# Altium PCB PCB1.PcbDoc
Units mm, origin at the board's own origin, x right, y up, seen from the top; angles counter-clockwise.
Board outline 21.6 x 22.6 mm, 2 copper layers (Top Layer, Bottom Layer), stack 1.571 mm thick; 14 components, 11 nets, 32 pads, 0 vias.
Unrouted connection lines stored in the file: 25.
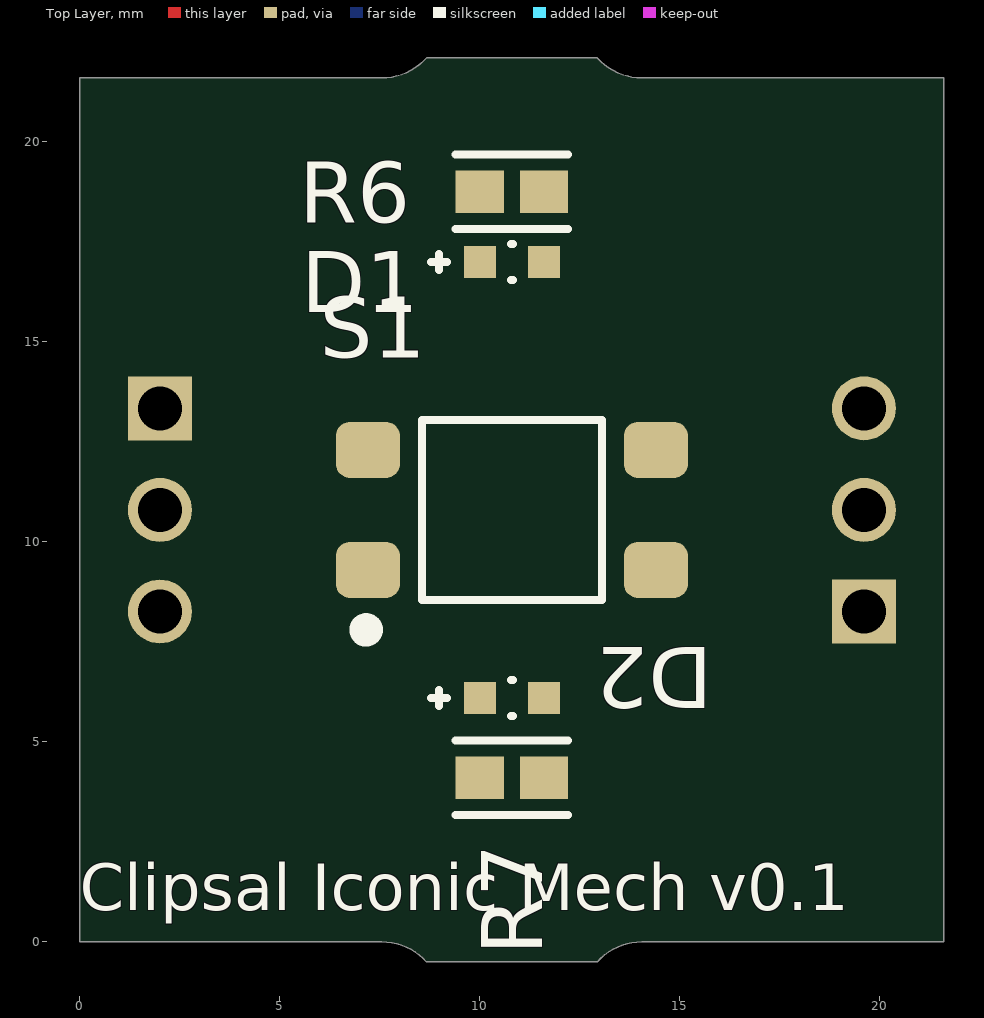
[diagram p0: Top Layer view]
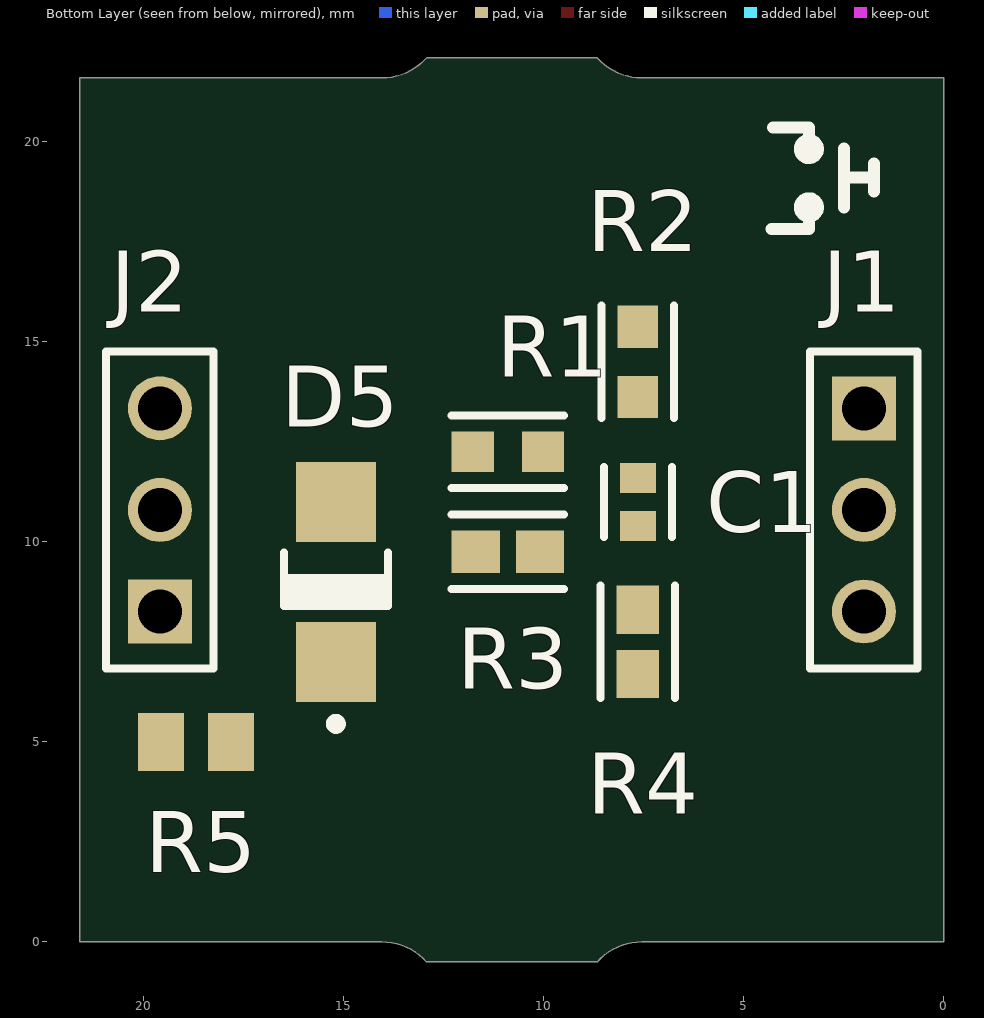
[diagram p1: Bottom Layer view, seen from below]

## Layer stack, top to bottom
Top Solder: solder mask 0.0102, Solder Resist, Dk 3.5
Top Layer: signal copper 0.0356
Dielectric 1: dielectric 1.5, FR-4, Dk 4.8
Bottom Layer: signal copper 0.0356
Bottom Solder: solder mask 0.0102, Solder Resist, Dk 3.5

## Board outline
0,0 7.55,0 cw(c7.55,-1.5) 8.668,-0.5 12.932,-0.5 cw(c14.05,-1.5) 14.05,0 21.6,0 21.6,21.6 14.05,21.6 cw(c14.05,23.1) 12.932,22.1 8.668,22.1 cw(c7.55,23.1) 7.55,21.6 0,21.6

## Design rules (kind name [scope] priority, off if disabled: settings)
Clearance [All] p1: gap=0.254 ignorepadtopadclearanceinfootprint=FALSE except(0: Arc-Hole Track-Hole SMDPad-Hole THPad-Hole Via-Hole Fill-Hole Poly-Hole Region-Hole Text-Hole)
PolygonConnect [All] p1: connectstyle=Relief reliefconductorwidth=0.254 reliefentries=4 polygonreliefangle="90 Angle" airgapwidth=0.254
RoutingVias [All] p1: holewidth=0.711 width=1.27 viastyle="Through Hole" minholewidth=0.711 minwidth=1.27 maxholewidth=0.711 maxwidth=1.27
SolderMaskExpansion [All] p1: expansion=0.102 istentingtop=FALSE
Width [All] p1: maxlimit=0.254 minlimit=0.254 preferedwidth=0.254
30 further rules are at their usual default settings.

## Components (designator, comment, footprint, x,y, rotation, side; value= is the part's Value field where it differs from the comment)
C1 "0.1uF-25V-0603" FP-C0603C-CF-MFG 7.65,11 r270 bottom value="0.10 μF"
D1 "QBLP601-IW" FP-QBLP601-IW-MFG 10.8,17 r0 top
D2 "QBLP601-IW" FP-QBLP601-IW-MFG 10.8,6.1 r0 top
D5 "3.3V-1.5W" ONSC-SMA-2-403D-02_F_V 15.2,9 r90 bottom value="6.2V Zener"
J1 "61300311121" 61300311121 2,10.8 r270 bottom
J2 "61300311121" 61300311121 19.6,10.8 r90 bottom
R1 "31.6-0603" FP-RT0603-IPC_A 10.9,12.25 r180 bottom value=31.6Ω
R2 "31.6-0603" FP-RT0603-IPC_A 7.65,14.5 r90 bottom value=31.6Ω
R3 "0-0603" FP-RMCF0603-IPC_A 10.9,9.75 r180 bottom value=0mΩ
R4 "0-0603" FP-RMCF0603-IPC_A 7.65,7.5 r270 bottom value=0mΩ
R5 "10-0805-0.5W" RESC2013X70X40NL20T20 18.7,5 r180 bottom
R6 "0-0603" FP-RMCF0603-IPC_A 10.8,18.75 r0 top value=0mΩ
R7 "0-0603" FP-RMCF0603-IPC_A 10.8,4.1 r0 top value=0mΩ
S1 "Switch" "E-Switch TL3305" 10.8,10.8 r0 top

## Footprints (in the part's own frame and the unit in brackets; to place one, negate y for a bottom-side part, rotate by r counter-clockwise, add the part's x,y. Pads: shape width x height; smd on the part's side, far side on the other; paste and mask are expansions set on the pad)
61300311121 [mm] "Pin Header, pitch 2.54 mm, THT, Vertical, single row, 3p"
  rect 1.6x1.6 hole 1.1: 1(-2.54,0)
  round 1.6 hole 1.1: 2(0,0) 3(2.54,0)
  silkscreen extent -3.96,-1.35 3.96,1.35, body extent -3.81,-1.27 3.81,1.27, height 8.57
"E-Switch TL3305" [mm]
  rrect50% 1.6x1.4 smd: 1(-3.6,-1.5) 2(3.6,-1.5) 3(-3.6,1.5) 4(3.6,1.5)
  silkscreen extent -3.81,-3.17 2.25,2.25, body extent -2.25,-2.25 2.25,2.25, height 3.8
FP-C0603C-CF-MFG [mm]
  rect 0.75x0.9 smd paste+0 mask+0: 1(-0.6,0) 2(0.6,0)
  silkscreen extent -0.87,-0.85 0.88,0.85, body extent -0.8,-0.4 0.8,0.4, height 0.87
FP-QBLP601-IW-MFG [mm]
  rect 0.8x0.8 smd paste+0 mask+0: 1(-0.8,0) 2(0.8,0)
  silkscreen extent -2.02,-0.45 0.03,0.45, body extent -1.3,-0.55 1.3,0.55, height 0.25
FP-RMCF0603-IPC_A [mm]
  rect 1.206x1.058 smd paste+0 mask+0: 1(-0.801,0) 2(0.801,0)
  silkscreen extent -1.4,-0.93 1.4,0.93, body extent -0.77,-0.4 0.77,0.4, height 0.55
FP-RT0603-IPC_A [mm]
  rect 1.059x1.012 smd paste+0 mask+0: 1(-0.877,0) 2(0.877,0)
  silkscreen extent -1.41,-0.91 1.41,0.91, body extent -0.76,-0.4 0.84,0.4, height 0.58
ONSC-SMA-2-403D-02_F_V [mm] "Molded, 2-Leads, Body 4.32x2.6mm"
  rect 2x2 smd: 1(-2,0) 2(2,0)
  silkscreen extent -3.67,-1.3 0.74,1.3, body extent -2.16,-1.3 2.16,1.3, height 2.2
RESC2013X70X40NL20T20 [mm] "Chip Resistor, 2-Leads, Body 2.00x1.25mm, IPC Medium Density"
  rect 1.15x1.45 smd: 1(-0.875,0) 2(0.875,0)
  body extent -1.1,-0.72 1.1,0.72, height 0.7

## Part data
C1: library part CMP-2006-02291-2, "CAP CER 0.1UF 25V X7R 0603", Capacitance="0.10 μF", Manufacturer=KEMET, Manufacturer Part Number=C0603C104K3RAC7411, Package=C0603C-CF, Temperature="-55°C to +125°C", Temperature Characteristic=X7R, Temperature Coefficient=30ppm/°C, Temperature Range High=+125°C, Temperature Range Low=-55°C, Tolerance=0.1, Voltage Rating="25 V", Automotive=Yes, Automotive Grade="Grade 1", Category=Cap, ComponentLink2Description=Datasheet, ComponentLink2URL=https://api.kemet.com/component-edge/download/datasheet/C0603C100J5GACAUTO.pdf, Device Class L1="Passive Components", Device Class L2=Capacitors, Device Class L3="Ceramic Capacitors", Digikey Description="CAP CER 0.1UF 25V X7R 0603", Height=0.87mm, Lead Free=Yes, Material=Ceramic, Mouser Description="Multilayer Ceramic Capacitors MLCC - SMD/SMT 25volts 0.1uF X7R 10%", Octopart=https://octopart.com/c0603c104k3rac7411-kemet-9138804, RoHS=TRUE
D1 D2: library part CMP-113271-000006-1, "LED WHITE CLEAR 0603 SMD", Case Code (Imperial)=0603, Case Code (Metric)=1608, Color=White, Forward Voltage=3.2V, Lens Color=Colorless, Test Current=20mA, Case/Package=0603, Height=0.6mm, Length=1.6mm, Lens Size=0.8mm, Lens Style=Flat, Lens Transparency=Clear, Luminous Intensity=330mcd, Mount="Surface Mount", Packaging="Tape and Reel", Width=0.8mm
D5: library part CMP-1060-00079-2, "1.5 W Zener Voltage Regulator, 2-Pin SMA, Pb-Free, Tape and Reel", Manufacturer="On Semiconductor", PartNumber=1SMA5920BT3G, ComponentLink1Description="Manufacturer URL", ComponentLink1URL=http://www.onsemi.com/, ComponentLink2Description=Datasheet, ComponentLink2URL=http://www.onsemi.com/pub_link/Collateral/1SMA5913BT3-D.PDF, ComponentLink3Description="Package Specification", ComponentLink3URL=http://www.onsemi.com/pub_link/Collateral/1SMA5913BT3-D.PDF, DatasheetVersion="Rev. 8", Mounting Technology="Surface Mount", PackageDescription="2-Pin Small Molded Package, J-Bend Lead, Body 2.605 x 4.315 mm", PackageReference=SMA-2-403D-02_F, PackageVersion="Rev. F, 11/2008", Packing="Tape and Reel", RoHS=Pb-Free, VZ Typ (V)=6.2
J1 J2: library part CMP-1502-01062-1, "THT Vertical Pin Header WR-PHD, Pitch 2.54 mm, Single Row, 3 pins", Contact Resistance=20mOhm, Manufacturer="Wurth Elektronik", Operating Temperature=-40to105degC, Rated Current=3A, Withstanding Voltage=500VAC, Working Voltage=250VAC, Datasheet URL=https://katalog.we-online.de/em/datasheet/6130xx11121.pdf, Gender=Male, Manufacturer URL=http://www.we-online.de, Mounting Technology=THT, Orientation=Vertical, Package Reference=61300311121, Packaging=Bag, Part Number=61300311121, Pin Number=3, Pitch=2.54mm, Publisher=WurthElektronik, Row Number=Single
R1 R2: library part CMP-03412-007392-1, "RES SMD 31.6 OHM 0.5% 1/10W 0603", Manufacturer=Yageo, Manufacturer Part Number=RT0603DRD0731R6L, Package=RT0603, Power Rating=0.1W, Resistance=31.6Ω, Temperature="-55°C to +155°C", Temperature Coefficient="25 ppm/°C", Temperature Range High=+155°C, Temperature Range Low=-55°C, Tolerance=0.005, Voltage Rating=75V, Automotive=No, Category=Res, ComponentLink2Description=Datasheet, ComponentLink2URL=http://www.yageo.com/documents/recent/PYu-RT_1-to-0.01_RoHS_L_9.pdf, Composition="Thin Film", Device Class L1="Passive Components", Device Class L2=Resistors, Device Class L3="Chip SMD Resistors", Digikey Description="RES SMD 31.6 OHM 0.5% 1/10W 0603", Footprint Url=http://www.yageo.com/exep/pages/download/literatures/PYu-R_Mount_10.pdf, Height=0.55mm, Ipc Land Pattern Name=RESC16080X45, Lead Free=Yes, Octopart=https://octopart.com/rt0603drd0731r6l-yageo-1240423, RoHS=TRUE, Series=RT
R3 R4 R6 R7: library part CMP-26527-000011-1, "RES 0 OHM JUMPER 1/10W 0603", Manufacturer=Stackpole, Manufacturer Part Number=RMCF0603ZT0R00, Package=RMCF0603, Power Rating=0.1W, Resistance=0mΩ, Temperature="-55°C to +155°C", Temperature Range High=+155°C, Temperature Range Low=-55°C, Voltage Rating=75V, Automotive=Yes, Automotive Grade="Grade 0", Category=Res, ComponentLink2Description=Datasheet, ComponentLink2URL=https://www.seielect.com/catalog/sei-rmcf_rmcp.pdf, Composition="Thick Film", Device Class L1="Passive Components", Device Class L2=Resistors, Device Class L3="Chip SMD Resistors", Digikey Description="RES 0 OHM JUMPER 1/10W 0603", Height=0.55mm, Ipc Land Pattern Name=RESC15580X45, Lead Free=Yes, Octopart=https://octopart.com/rmcf0603zt0r00-stackpole+electronics-19213618, RoHS=TRUE, Series=RMCF
R5: library part CMP-2001-00475-1, Manufacturer=Panasonic, Part Number=ERJ-P06J100V
S1: Supplier Part Number 1=84Y2774, Supplier 1=Newark

## Nets (pads, with @x,y where several pads share a name; then routed paths per layer and width w, separated by ;. In a path a pad name is that pad's centre, name@x,y a point inside that pad or via, vN(x,y) a via of type N, cw(c..) or ccw(c..) an arc to the next point about the centre after c; other vN are vias at no path point)
NetC1_1: C1.1 R1.2 R2.1
NetC1_2: C1.2 R3.2 R4.1
NetD1_1: D1.1 D2.1 D5.1 R5.2
NetD1_2: D1.2 R6.2
NetD2_2: D2.2 R7.2
NetD5_2: D5.2 J2.2 R6.1 R7.1
NetJ1_1: J1.1 R1.1
NetJ1_3: J1.3 R3.1
NetJ2_1: J2.1 R5.1
NetR2_2: R2.2 S1.1 S1.2
NetR4_2: R4.2 S1.3 S1.4
pads on no net: J1.2 J2.3

## Silkscreen, mask and mechanical layers (free items; w line width, h text height)
Top Overlay:
  text "Clipsal Iconic Mech v0.1" at 0,0.4 h2
Bottom Overlay:
  circle w0.254: c3.375,19.823 r0.25
  circle w0.254: c3.375,18.362 r0.25
  lines w0.3: 1.75,18.762 1.75,19.462 ; 1.75,19.112 2.5,19.112 ; 2.5,18.362 2.5,19.837 ; 3.375,18.362 3.375,17.822 4.315,17.822 ; 3.375,19.823 3.375,20.362 4.275,20.362
Board Shape:
  the board outline again, w0.1

## Dimensions
8.668,22.1 to 12.932,22.1 on Dimensions
12.932,22.1 to 21.6,21.6 on Dimensions
21.6,0 to 0,0 on Dimensions
21.6,21.6 to 21.6,0 on Dimensions